# Altium PCB PCB1.PcbDoc (part 2 of 3)
Units mm, origin at the board's own origin, x right, y up, seen from the top; angles counter-clockwise.
Board outline 238 x 185 mm, 2 copper layers (Top Layer, Bottom Layer); 253 components, 247 nets, 920 pads, 36 vias.
Unrouted connection lines stored in the file: 56.
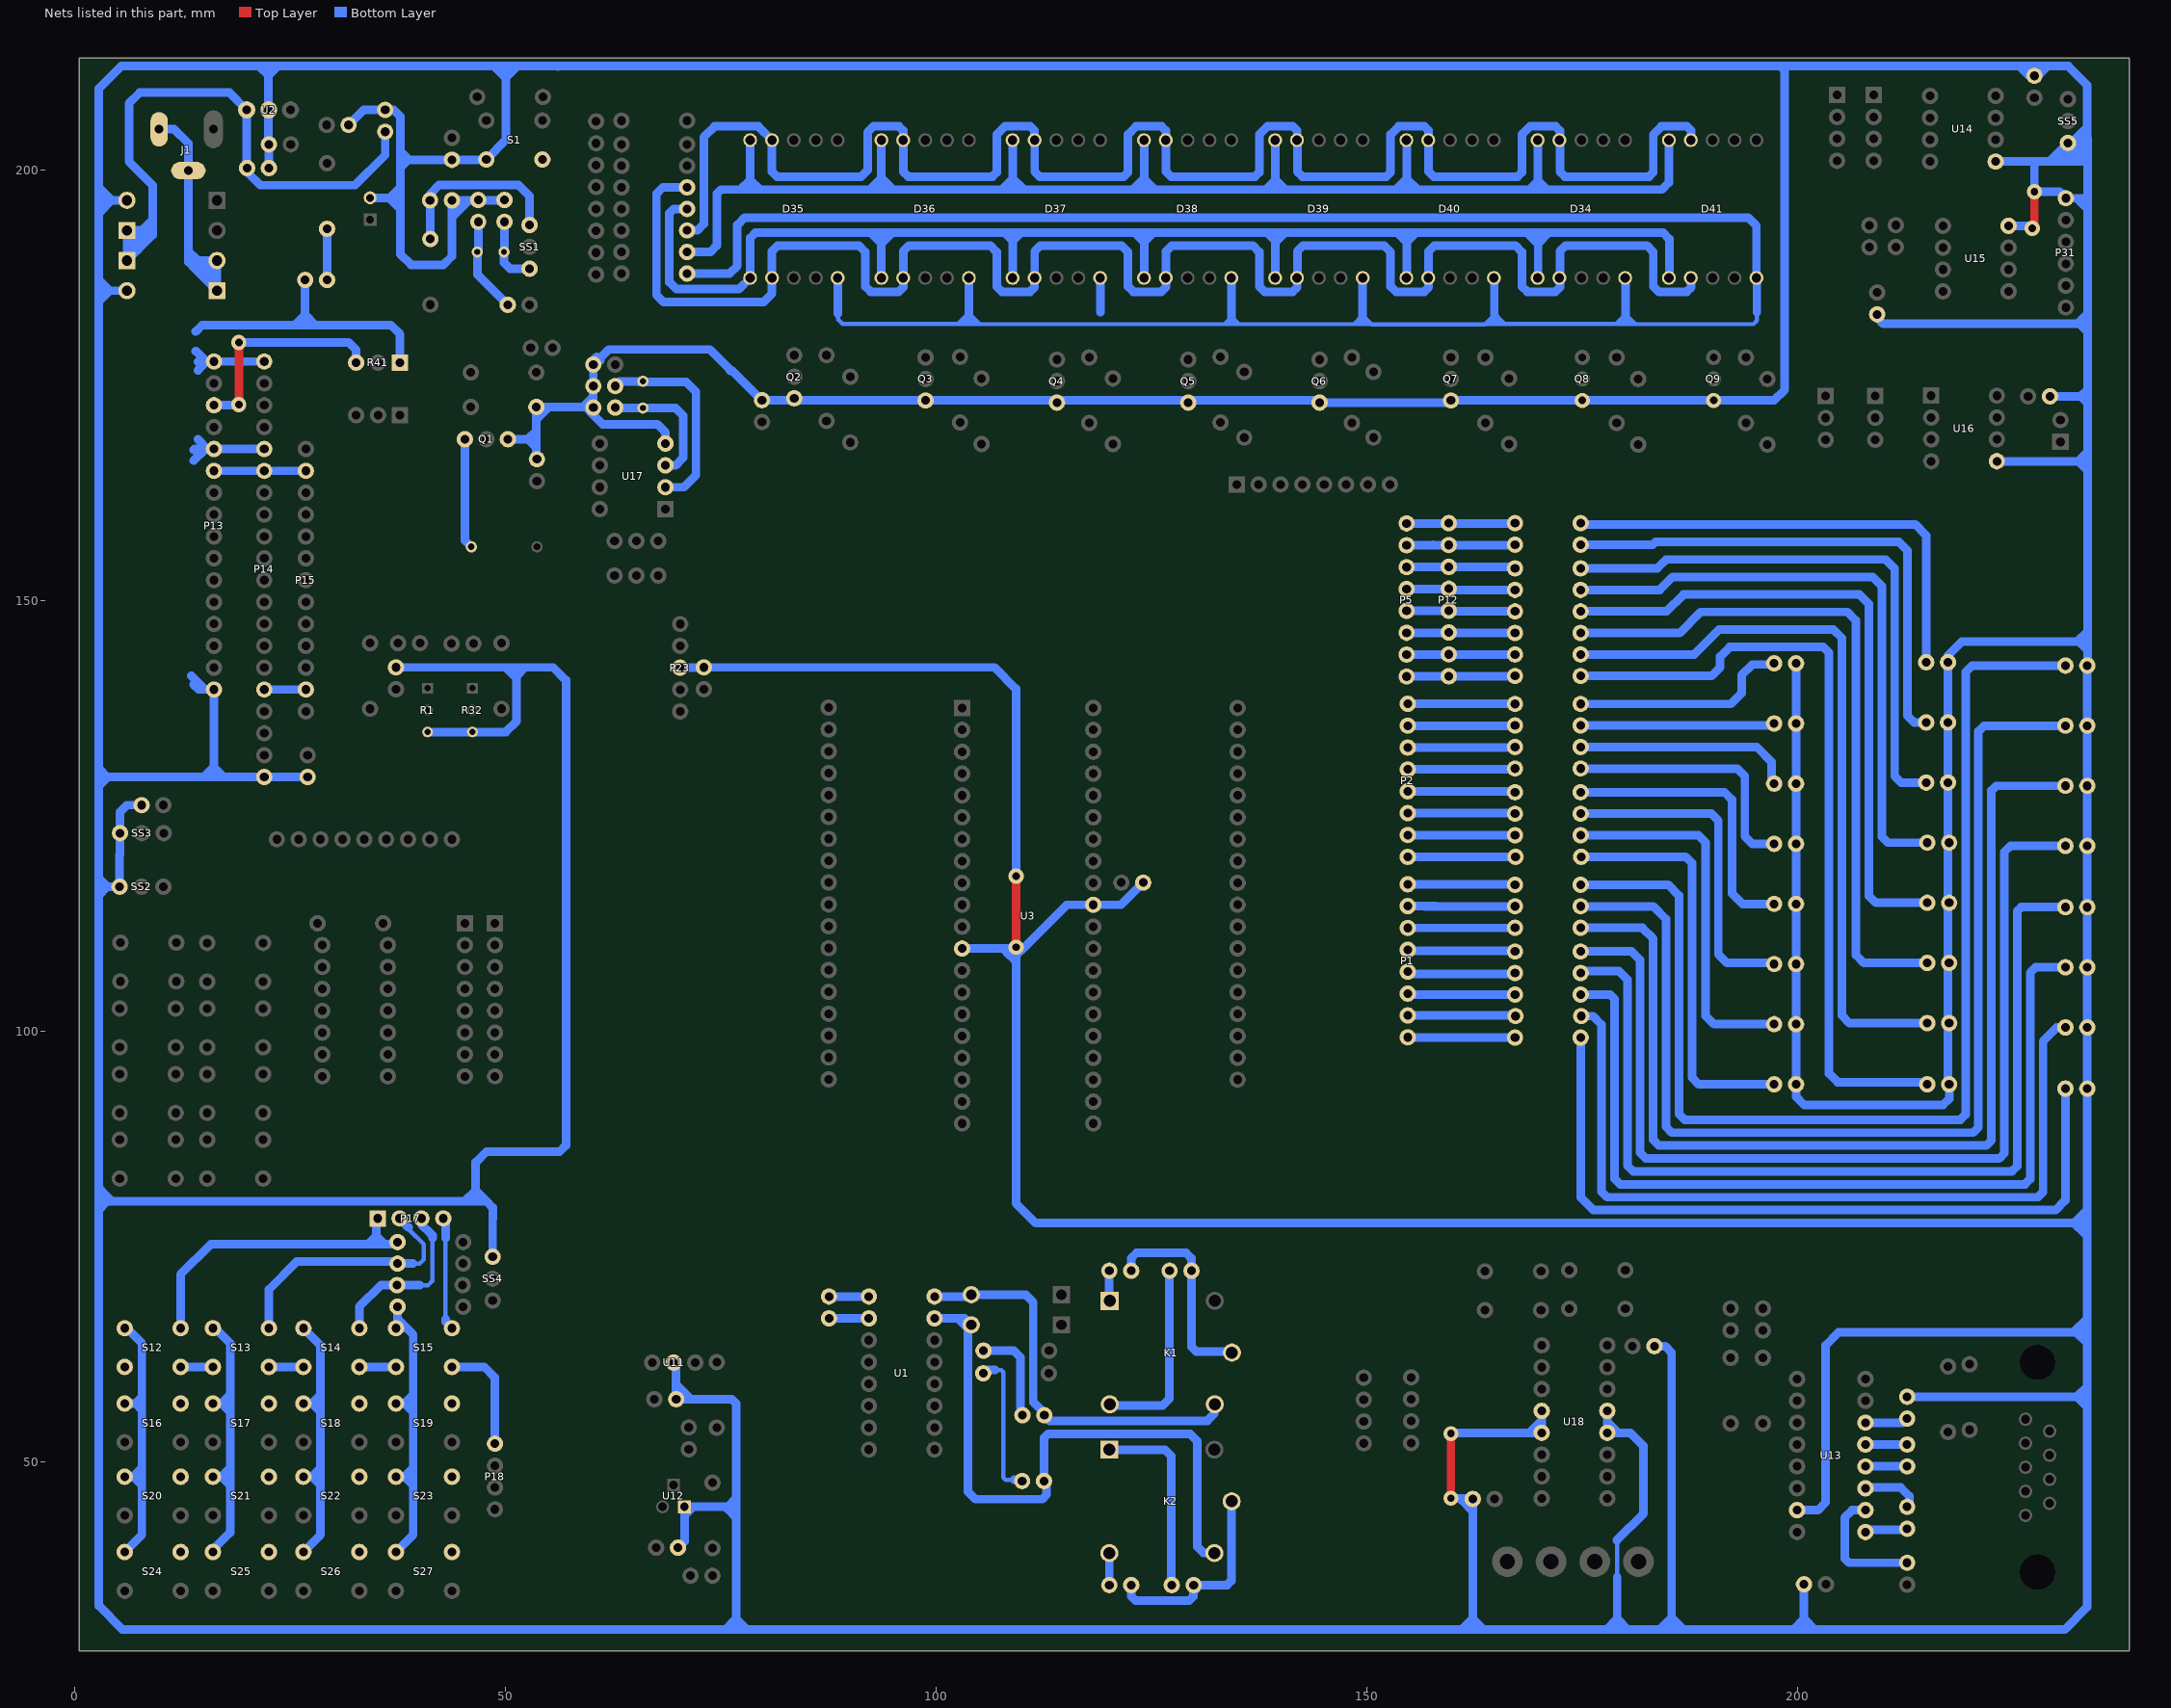
[diagram p2: the nets of this part, all layers, seen from the top]

## Via types
v1: diameter 1.778, hole 0.889, Top Layer to Bottom Layer, 36 vias

## Nets (pads, with @x,y where several pads share a name; then routed paths per layer and width w, separated by ;. In a path a pad name is that pad's centre, name@x,y a point inside that pad or via, vN(x,y) a via of type N, cw(c..) or ccw(c..) an arc to the next point about the centre after c; other vN are vias at no path point) (continued)
c2: P14.16 P15.12 | length 4.8
  Bottom Layer w1: P14.16@21.963,139.676 P15.12@26.789,139.676
D: D34.2 D35.2 D36.2 D37.2 D38.2 D39.2 D40.2 D41.2 R58.2 | length 203
  Bottom Layer w1: R58.2@71.06,198 68.25,198 67.5,197.25 67.5,185.5 68.325,184.675 79.925,184.675 80.919,185.669 D35.2@80.919,187.485 80.919,190.581 81.588,191.25 91,191.25 91.75,190.5 91.75,186.5 92.375,185.875 95.625,185.875 96.159,186.409 D36.2@96.159,187.485 ; D36.2@96.169,187.485 96.169,190.581 96.838,191.25 106.25,191.25 107,190.5 107,186.5 107.625,185.875 110.875,185.875 111.409,186.409 D37.2@111.409,187.485 ; D37.2@111.419,187.485 111.419,190.581 112.088,191.25 121.5,191.25 122.25,190.5 122.25,186.5 122.875,185.875 126.125,185.875 126.659,186.409 D38.2@126.659,187.485 ; D38.2@126.669,187.485 126.669,190.581 127.338,191.25 136.75,191.25 137.5,190.5 137.5,186.5 138.125,185.875 141.375,185.875 141.909,186.409 D39.2@141.909,187.485 ; D39.2@141.919,187.485 141.919,190.581 142.588,191.25 152,191.25 152.75,190.5 152.75,186.5 153.375,185.875 156.625,185.875 157.159,186.409 D40.2@157.159,187.485 ; D40.2@157.169,187.485 157.169,190.581 157.838,191.25 167.25,191.25 168,190.5 168,186.5 168.625,185.875 171.875,185.875 172.409,186.409 D34.2@172.409,187.485 ; D34.2@172.419,187.485 172.419,190.581 173.088,191.25 182.5,191.25 183.25,190.5 183.25,186.5 183.875,185.875 187.125,185.875 187.659,186.409 D41.2@187.659,187.485
DP: D34.5 D35.5 D36.5 D37.5 D38.5 D39.5 D40.5 D41.5 R62.2 | length 302.9
  Bottom Layer w0.5: 88.615,183.25 88.615,182.635 89.115,182.135 98.067,182.135 98.071,182.139 99.429,182.139 99.433,182.135 102.5,182.135 ; 103.779,183.25 103.779,183.164 ; 119.039,183.424 119.039,183.5 ; 134.289,183 134.289,182.924 ; 148.5,182.135 150.5,182.135 ; 163.726,182.111 150.524,182.111 149.539,183.096 149.539,183.174 149.499,183.134 148.476,182.111 135.102,182.111 135.078,182.135 ; 164.789,182.5 165.635,182.5 ; 166,182.135 165.635,182.5 ; 181.25,182.135 181.154,182.135 ; 195.279,183.529 195.279,182.529 194.861,182.111 181.178,182.111 181.154,182.135 ; 102.5,182.135 102.75,182.135 ; 102.5,182.135 103.529,183.164 103.779,183.164 ; 102.75,182.135 104.75,182.135 ; 102.75,182.135 103.779,183.164 ; 103.779,183.164 103.971,183.164 105,182.135 ; 103.779,183.164 103.779,183.106 104.75,182.135 ; 104.75,182.135 105,182.135 ; 105,182.135 105.024,182.111 133.476,182.111 133.5,182.135 ; 133.5,182.135 135.078,182.135 ; 133.5,182.135 134.289,182.924 ; 134.289,182.924 135.078,182.135 ; 165.635,182.5 164.885,183.25 164.789,183.25 164.789,183.174 163.754,182.139 175.804,182.139 175.808,182.135 178.924,182.135 ; 178.924,182.135 179.289,182.5 ; 178.924,182.135 181.154,182.135 ; 179.289,182.5 180.039,183.25 180.645,182.644 ; 179.289,182.5 180.5,182.5 180.645,182.644 ; 180.645,182.644 181.154,182.135
  Bottom Layer w1: R62.2@71.06,188 76,188 76.879,188.879 76.879,193.629 77.75,194.5 194.25,194.5 195.222,193.528 D41.5@195.222,187.485 ; 88.539,183.326 D35.5@88.539,187.485 ; 103.779,182.5 103.779,183.106 ; 103.779,183.25 D36.5@103.779,187.485 D36.5@104,187.264 ; D37.5@119.029,187.485 D37.5@119.25,187.264 ; 119.039,183.5 D37.5@119.039,187.485 ; D38.5@134.279,187.485 D38.5@134.5,187.264 ; 134.289,182.461 134.289,182.924 ; 134.289,183 D38.5@134.289,187.485 ; D39.5@149.499,187.485 149.499,183.134 149.499,182.501 149.5,182.5 ; D39.5@149.529,187.485 D39.5@149.539,187.475 ; D40.5@164.779,187.485 D40.5@165,187.264 ; 164.789,182.5 164.789,183.174 ; 164.789,183.25 D40.5@164.789,187.485 ; 180.039,182.711 180.039,183.25 D34.5@180.039,187.485 ; 195.279,183.529 D41.5@195.279,187.485
E: D34.1 D35.1 D36.1 D37.1 D38.1 D39.1 D40.1 D41.1 R59.2 | length 188.4
  Bottom Layer w1: R59.2@71.06,195.5 69.5,195.5 69,195 69,187 69.825,186.175 77.069,186.175 D35.1@78.379,187.485 78.379,192.121 79.008,192.75 92.349,192.75 ; D36.1@93.619,187.485 93.619,191.48 ; 95,192.75 94.889,192.75 ; D37.1@108.869,187.485 108.869,191.75 ; D38.1@124.119,187.485 124.119,191.631 ; D39.1@139.369,187.485 139.369,191.75 ; D40.1@154.629,187.485 154.629,191.629 ; D34.1@169.879,187.485 169.879,191.5 ; 171.25,192.75 171.129,192.75 ; D41.1@185.119,187.485 185.119,192.012 184.381,192.75 171.129,192.75 ; 92.349,192.75 93.5,192.75 ; 92.349,192.75 93.619,191.48 ; 93.5,192.75 94.889,192.75 ; 93.5,192.75 93.619,192.631 93.619,191.48 ; 93.619,191.48 94.889,192.75 ; 94.889,192.75 107.869,192.75 ; 107.869,192.75 108.75,192.75 ; 107.869,192.75 108.869,191.75 ; 108.75,192.75 109.869,192.75 ; 108.75,192.75 108.869,192.631 108.869,191.75 ; 108.869,191.75 109.869,192.75 ; 109.869,192.75 123,192.75 ; 123,192.75 124,192.75 ; 123,192.75 124.119,191.631 ; 124,192.75 125.25,192.75 ; 124,192.75 124.119,192.631 124.119,191.631 ; 124.119,191.631 124.131,191.631 125.25,192.75 ; 125.25,192.75 138.369,192.75 ; 138.369,192.75 139.25,192.75 ; 138.369,192.75 139.369,191.75 ; 139.25,192.75 140.5,192.75 ; 139.25,192.75 139.369,192.631 139.369,191.75 ; 139.369,191.75 139.5,191.75 140.5,192.75 ; 140.5,192.75 153.508,192.75 ; 153.508,192.75 154.5,192.75 ; 153.508,192.75 154.629,191.629 ; 154.5,192.75 155.75,192.75 ; 154.5,192.75 154.629,192.621 154.629,191.629 ; 154.629,191.629 155.75,192.75 ; 155.75,192.75 168.549,192.75 ; 168.549,192.75 169.879,192.75 ; 168.549,192.75 169.799,191.5 169.879,191.5 ; 169.879,191.5 169.879,192.75 ; 169.879,191.5 171.129,192.75 ; 169.879,192.75 171.129,192.75
en: P13.6 P14.6 P15.2 | length 10.7
  Bottom Layer w1: P13.6@16.121,165.076 P14.6@21.963,165.076 P15.2@26.789,165.076
F: D34.9 D35.9 D36.9 D37.9 D38.9 D39.9 D40.9 D41.9 R60.2 | length 199.6
  Bottom Layer w1: R60.2@71.06,193 72.25,193 73,193.75 73,203.845 74.25,205.095 79.309,205.095 D35.9@80.919,203.485 80.919,199.831 81.5,199.25 91.25,199.25 92.009,200.009 92.009,204.41 92.694,205.095 95.655,205.095 96.159,204.591 D36.9@96.159,203.485 ; D36.9@96.169,203.485 96.169,199.831 96.75,199.25 106.5,199.25 107,199.75 107,204.151 107.944,205.095 110.905,205.095 111.409,204.591 D37.9@111.409,203.485 ; D37.9@111.419,203.485 111.419,199.831 112,199.25 121.75,199.25 122.25,199.75 122.25,204.151 123.194,205.095 126.155,205.095 126.659,204.591 D38.9@126.659,203.485 ; D38.9@126.669,203.485 126.669,199.831 127.25,199.25 137,199.25 137.5,199.75 137.5,204.151 138.444,205.095 141.405,205.095 141.909,204.591 D39.9@141.909,203.485 ; D39.9@141.919,203.485 141.919,199.831 142.5,199.25 152.25,199.25 152.75,199.75 152.75,204.151 153.694,205.095 156.655,205.095 157.159,204.591 D40.9@157.159,203.485 ; D40.9@157.169,203.485 157.169,199.831 157.75,199.25 167.5,199.25 168,199.75 168,204.151 168.944,205.095 171.905,205.095 172.409,204.591 D34.9@172.409,203.485 ; D34.9@172.419,203.485 172.419,199.831 173,199.25 182.75,199.25 183.25,199.75 183.25,204.151 184.194,205.095 187.155,205.095 187.659,204.591 D41.9@187.659,203.485
G: D34.10 D35.10 D36.10 D37.10 D38.10 D39.10 D40.10 D41.10 R61.2 | length 198.9
  Bottom Layer w1: R61.2@71.06,190.5 73.75,190.5 74.5,191.25 74.5,197.25 75,197.75 77.25,197.75 ; 78.379,197.871 78.379,198.879 ; D35.10@78.379,203.485 78.379,198.879 ; 79.75,197.75 79.508,197.75 ; D36.10@93.619,203.485 93.619,199.111 ; D36.10@93.629,203.485 93.629,199.121 93.619,199.111 ; D37.10@108.869,203.485 108.869,199.03 ; D37.10@108.879,203.485 108.879,199.04 108.869,199.03 ; D38.10@124.119,203.485 124.119,199 ; D39.10@139.369,203.485 139.369,198.869 ; D40.10@154.619,203.485 154.619,199 ; D34.10@169.869,203.485 169.869,198.75 ; D41.10@185.062,203.485 185.062,198.562 184.25,197.75 170.869,197.75 ; 77.25,197.75 79.508,197.75 ; 77.25,197.75 78.379,198.879 ; 78.379,198.879 79.508,197.75 ; 79.508,197.75 92.258,197.75 ; 92.258,197.75 93.5,197.75 ; 92.258,197.75 93.619,199.111 ; 93.5,197.75 94.98,197.75 ; 93.5,197.75 93.619,197.869 93.619,199.111 ; 93.619,199.111 94.98,197.75 ; 94.98,197.75 107.589,197.75 ; 107.589,197.75 108.75,197.75 ; 107.589,197.75 108.869,199.03 ; 108.75,197.75 110,197.75 ; 108.75,197.75 108.869,197.869 108.869,199.03 ; 108.869,199.03 110,197.899 110,197.75 ; 110,197.75 122.829,197.75 ; 122.829,197.75 124,197.75 ; 122.829,197.75 124.079,199 ; 124,197.75 125.329,197.75 ; 124,197.75 124.119,197.869 124.119,198.96 ; 124.079,199 124.119,198.96 ; 124.079,199 124.119,199 ; 124.119,198.96 124.119,199 ; 124.119,198.96 125.329,197.75 ; 125.329,197.75 138.25,197.75 ; 138.25,197.75 139.25,197.75 ; 138.25,197.75 139.369,198.869 ; 139.25,197.75 140.488,197.75 ; 139.25,197.75 139.369,197.869 139.369,198.869 ; 139.369,198.869 140.488,197.75 ; 140.488,197.75 153.369,197.75 ; 153.369,197.75 154.5,197.75 ; 153.369,197.75 154.619,199 ; 154.5,197.75 155.869,197.75 ; 154.5,197.75 154.619,197.869 154.619,199 ; 154.619,199 155.869,197.75 ; 155.869,197.75 168.869,197.75 ; 168.869,197.75 169.75,197.75 ; 168.869,197.75 169.869,198.75 ; 169.75,197.75 170.869,197.75 ; 169.75,197.75 169.869,197.869 169.869,198.75 ; 169.869,198.75 170.869,197.75
GND: C1.2 C2.1 C3.1 C4.2 C5.1 C6.2 C7.1 C8.2 C9.2 C10.1 C11.1 C13.1 C14.1 C15.2 C16.1 C19.1 C20.1 C21.1 C22.1 C23.1 C24.1 C25.1 C26.2 C27.1 C28.2 C29.2 C31.1 D1.2 D2.2 D3.2 D4.2 D5.2 D6.2 D7.1 D9.2 D10.2 D11.2 D12.1 D14.2 D15.2 D16.2 D17.2 D18.2 D20.2 D21.2 D22.2 D23.2 D24.2 D25.2 D26.2 D27.2 D28.2 D29.2 D30.2 P13.1 P13.5 P13.16 P14.1 P14.5 P14.20 P16.2 P23.3 P31.6 Q1.3 Q2.3 Q3.3 Q4.3 Q5.3 Q6.3 Q7.3 Q8.3 Q9.3 R1.3 R32.3 R40.1 R41.1 S1.1 S1.2 SS2.3 SS3.3 SS4.3 SS5.3 U2.2 U3.12 U3.31 U11.GND U12.3 U13.15 U14.5 U15.4 U16.5 U17.4 U18.4 U18.5 U18.12 U18.13 | length 2218.5
  Top Layer w1: v1(109.25,109.75) v1(109.25,118) ; v1(159.75,45.75) v1(159.75,53.25) ; v1(227.25,193.25) 227.5,193.5 v1(227.5,197.5)
  Bottom Layer w0.4: 233.617,192.955 233.662,193 ; 233.662,192 233.662,192.043 ; 233.662,193.867 233.662,194
  Bottom Layer w0.5: 2.75,200.25 2.75,200.45 ; 2.75,202.45 2.75,202.5 ; 179.004,40.857 179.056,40.805 179.056,36.597 ; 233.456,186.595 233.662,186.389
  Bottom Layer w1: 2.742,79.25 2.75,79.258 ; 2.75,79.5 2.75,79.258 ; 2.75,141.03 2.75,140.926 ; 2.75,200.25 2.75,197.75 ; 2.75,200.45 2.75,201.25 ; 2.754,177.776 2.75,177.78 ; 2.766,201.234 2.75,201.25 ; SS3.3@5.21,123 5.21,125.46 6,126.25 C23.1@7.71,126.25 ; SS3.3@5.21,123.24 5.21,120.57 5.17,120.53 SS2.3@5.17,116.78 3.72,116.78 ; D12.1@6.02,186 4,186 ; D7.1@6.02,196.5 4.25,196.5 ; 13.5,141.25 15.074,139.676 ; 13.75,140.25 14.324,139.676 15.074,139.676 ; 13.75,166.25 15.116,167.616 ; 13.75,167.5 13.866,167.616 15.116,167.616 ; 14,179 P13.1@15.224,177.776 ; 14,181.25 14.75,182 25.5,182 ; 14.25,168.75 P13.5@15.384,167.616 ; 14.25,176.75 P13.1@15.276,177.776 ; 14.25,177.75 14.276,177.776 P13.1@15.224,177.776 ; P14.5@21.963,167.616 P13.5@16.121,167.616 P13.5@15.384,167.616 ; P14.1@21.963,177.776 P13.1@16.121,177.776 P13.1@15.276,177.776 ; C3.1@22.5,200.25 C2.1@22.5,203 22.46,203.04 U2.2@22.46,207 22.46,211 ; D15.2@26.71,187.25 26.71,183.21 ; C21.1@27,129.516 P14.20@21.963,129.516 17.25,129.516 ; 28,182 27.92,182 ; C4.2@31.75,205.25 33.5,207 C1.2@36,207 37,207 37.753,206.248 37.753,202.208 ; P16.2@34.25,196.79 36.542,196.79 ; C14.1@37.25,142.25 50,142.25 ; R41.1@37.711,177.649 37.711,180.961 36.672,182 27.92,182 ; R1.3@40.925,134.75 R32.3@46.132,134.75 50,134.75 51.25,136 51.25,136.712 51.253,136.714 51.253,138.166 51.25,138.168 51.25,141.25 52.25,142.25 ; C9.2@46.678,196.54 C9.2@46.805,196.54 ; SS4.3@48.53,73.84 SS4.3@48.48,73.79 48.48,78.27 48.5,78.29 48.5,79.5 47.75,80.25 ; C6.2@49.853,196.54 49.813,196.5 45.75,196.5 ; Q1.3@50.25,168.75 52.56,168.75 ; 51,141.25 50,142.25 ; 51.5,212.093 51.343,212.093 ; 53.5,168.75 52.56,168.75 ; R40.1@53.56,172.75 R40.1@53.56,172.5 ; C13.1@53.625,166.425 53.56,166.49 53.56,167.75 ; 56.063,212.031 56,212.093 ; 58.25,172.5 58,172.5 ; C28.2@60.096,175 C28.2@60.173,174.923 ; 60.139,173.605 60.139,173.639 ; U17.4@68.543,168.253 68.543,169.553 67.596,170.5 61.25,170.5 C29.2@60.173,171.577 ; U11.GND@69.501,61.5 69.75,61.251 69.75,59 ; C7.1@69.75,57.25 69.75,59 ; C7.1@69.79,57.25 71.5,57.25 ; C8.2@70,40 70.75,40.75 70.75,43.75 ; P23.3@70.25,142.21 72.96,142.21 C16.1@73,142.25 106.75,142.25 109.25,139.75 v1(109.25,118) ; C22.1@79.73,173.27 76.316,176.684 76.108,176.684 76.042,176.75 76.042,176.829 73.696,179.175 61.987,179.175 60.961,178.149 60.961,177.913 60.562,178.312 60.173,177.923 C27.1@60.173,177.423 C28.2@60.173,174.923 ; C22.1@79.75,173.29 83.29,173.29 Q2.3@83.5,173.5 ; Q2.3@83.5,173.25 Q3.3@98.75,173.25 129,173.25 Q5.3@129.25,173 ; U3.12@102.986,109.59 107.75,109.59 ; 110.5,110.024 110.226,109.75 ; C5.1@124.016,117.25 121.436,114.67 U3.31@118.226,114.67 115.146,114.67 110.226,109.75 ; Q5.3@129.25,173.25 144.25,173.25 Q6.3@144.5,173 159.5,173 Q7.3@159.75,173.25 Q8.3@175,173.25 Q9.3@190.25,173.25 197.25,173.25 198.5,174.5 198.5,211.593 198,212.093 ; v1(159.75,45.75) 160.975,45.75 ; v1(159.75,53.25) 159.849,53.349 168.889,53.349 ; 170.286,54.75 170.286,54.746 ; U18.4@170.286,55.889 170.286,54.746 ; U18.13@177.906,55.889 177.906,54.619 ; 179.004,40.857 182.124,43.977 182.124,51.801 180.576,53.349 179.176,53.349 ; 179.056,36.597 179.056,31.75 ; 179.43,53.349 179.176,53.349 ; C31.1@183.374,63.415 184.624,63.415 185.374,62.665 185.374,31.874 ; D11.2@199.821,142.717 D14.2@199.821,135.732 D16.2@199.821,128.747 D17.2@199.821,121.762 D18.2@199.821,114.777 D20.2@199.821,107.792 D21.2@199.821,100.807 D22.2@199.821,93.822 199.821,92.385 200.781,91.425 216.897,91.425 217.647,92.175 217.647,93.776 D30.2@217.601,93.822 217.474,93.949 D25.2@217.474,128.874 D24.2@217.474,135.859 D23.2@217.474,142.844 217.474,143.636 219.088,145.25 232.5,145.25 ; U13.15@199.942,44.361 U13.15@199.946,44.365 202.365,44.365 203.25,45.25 203.25,63.5 204.75,65 232,65 ; C11.1@200.75,35.75 200.75,31.75 ; C24.1@209.25,183.25 209.25,182.861 209.946,182.165 232.5,182.165 ; C15.2@212.727,57.54 232.429,57.54 ; U14.5@223,201 227.5,201 ; U16.5@223.142,166.188 232.6,166.188 ; U16.5@223.142,166.688 U16.5@223.477,166.353 ; U15.4@224.5,193.54 227.46,193.54 227.25,193.33 v1(227.25,193.25) ; C25.1@229.312,173.728 232.89,173.728 ; SS5.3@231.812,203.165 SS5.3@231.397,203.165 ; 233.639,66.75 233.639,66.639 ; 233.639,74.126 233.639,66.639 ; 233.647,73.258 233.647,76.5 ; 233.662,183.5 233.662,183.327 ; 233.662,192 233.662,186.389 233.662,183.327 ; 233.662,192.043 233.662,193 233.662,193.867 ; 233.662,194 233.662,195.5 ; 2.75,79.258 2.75,79.75 ; 2.75,79.258 3.742,80.25 ; 2.75,79.258 2.75,33.25 5.5,30.5 75.5,30.5 ; 2.75,79.75 3.25,80.25 3.742,80.25 ; 2.75,79.75 2.75,81.5 ; 2.75,81.5 3,81.5 4.25,80.25 ; 2.75,81.5 2.75,113.28 2.75,115.81 ; 2.75,115.81 2.75,116.75 ; 2.75,115.81 3.72,116.78 ; 2.75,116.75 2.75,117.75 ; 2.75,116.75 2.78,116.78 3.72,116.78 ; 2.75,117.75 2.75,128.5 ; 2.75,117.75 3.72,116.78 ; 2.75,128.5 2.75,129.25 ; 2.75,128.5 3.766,129.516 ; 2.75,129.25 2.75,130.5 ; 2.75,129.25 3.016,129.516 3.734,129.516 ; 2.75,130.5 2.75,140.926 ; 2.75,130.5 3.734,129.516 ; 2.75,140.926 2.75,177.78 ; 2.75,177.78 2.75,184.75 ; 2.75,184.75 4,186 ; 2.75,184.75 2.75,186.25 ; 2.75,186.25 3,186 4,186 ; 2.75,186.25 2.75,187.25 ; 2.75,187.25 4,186 ; 2.75,187.25 2.75,195 ; 2.75,195 4.25,196.5 ; 2.75,195 2.75,196.5 ; 2.75,196.5 4.25,196.5 ; 2.75,196.5 2.75,197.75 ; 2.75,197.75 3,197.75 4.25,196.5 ; 2.75,201.25 2.75,202.45 2.75,209.5 5.343,212.093 21.367,212.093 ; 3.734,129.516 3.766,129.516 ; 3.742,80.25 4.25,80.25 ; 3.766,129.516 14.887,129.516 ; 4.25,80.25 5.75,80.25 45.25,80.25 ; 14.887,129.516 16.121,129.516 ; 14.887,129.516 16.121,130.75 ; 15.074,139.676 P13.16@16.121,139.676 16.121,130.75 ; 15.116,167.616 P13.5@15.384,167.616 ; P13.1@15.224,177.776 P13.1@15.276,177.776 ; 16.121,129.516 17.25,129.516 ; 16.121,129.516 16.121,130.645 ; 16.121,130.645 16.121,130.75 ; 16.121,130.645 17.25,129.516 ; 21.367,212.093 22.25,212.093 ; 21.367,212.093 22.46,211 ; 22.25,212.093 23.553,212.093 ; 22.25,212.093 22.46,211.883 22.46,211 ; 22.46,211 23.553,212.093 ; 23.553,212.093 48.657,212.093 ; 25.5,182 26.71,183.21 ; 25.5,182 26.75,182 ; 26.71,183.21 26.71,182.04 26.75,182 ; 26.71,183.21 27.92,182 ; 26.75,182 27.92,182 ; 36.542,196.79 37.753,198 ; 36.542,196.79 37.713,196.79 37.753,196.75 ; 36.542,196.79 36.542,196.71 37.753,195.5 ; 37.753,195.5 37.753,190.25 39,189.002 39,189 42.75,189 43.75,190 43.75,194.5 ; 37.753,195.5 37.753,196.75 ; 37.753,196.75 37.753,198 ; 37.753,198 37.753,200.25 ; 37.753,200.25 37.753,201.25 ; 37.753,200.25 38.713,201.21 ; 37.753,201.25 37.753,202.208 ; 37.753,201.25 37.792,201.21 38.713,201.21 ; 37.753,202.208 38.75,201.21 ; 38.713,201.21 38.75,201.21 ; 38.75,201.21 47.719,201.21 S1.2@47.749,201.239 50,203.491 50,210.75 ; 43.75,194.5 C10.1@43.75,196.5 45.75,196.5 ; 43.75,194.5 45.75,196.5 ; 45.25,80.25 46.25,80.25 ; 45.25,80.25 46.5,81.5 ; 46.25,80.25 46.5,80.5 ; 46.25,80.25 46.5,80.25 ; 46.5,80.25 47.75,80.25 ; 46.5,80.25 46.5,80.5 ; 46.5,80.5 46.5,81.5 ; 46.5,81.5 46.5,84.75 47.75,86 56.25,86 57,86.75 57,140.75 55.5,142.25 55,142.25 52.25,142.25 ; 46.5,81.5 47.75,80.25 ; 48.657,212.093 50,210.75 ; 48.657,212.093 50,212.093 ; 50,142.25 52.25,142.25 ; 50,210.75 50,212.093 ; 50,210.75 51.343,212.093 ; 50,212.093 51.343,212.093 ; 51.343,212.093 56,212.093 ; 52.56,168.75 53.56,167.75 ; 52.56,168.75 53.56,169.75 ; 53.56,167.75 53.56,169.75 ; 53.56,169.75 53.56,171 53.56,171.06 ; 53.56,171.06 55,172.5 ; 53.56,171.06 R40.1@53.56,172.5 ; R40.1@53.56,172.5 55,172.5 ; 55,172.5 58,172.5 ; 56,212.093 198,212.093 ; 58,172.5 59,172.5 ; 59,172.5 60.139,173.639 ; 59,172.5 C29.2@59.25,172.5 ; C29.2@59.25,172.5 C29.2@60.173,171.577 ; C29.2@59.25,172.5 60.096,172.5 C29.2@60.173,172.423 ; 60.139,173.639 60.139,174.034 C28.2@60.173,174.034 ; 60.139,173.639 60.173,173.673 ; C29.2@60.173,171.577 C29.2@60.173,172.423 ; C29.2@60.173,172.423 60.173,173.673 ; 60.173,173.673 C28.2@60.173,174.034 ; C28.2@60.173,174.034 C28.2@60.173,174.923 ; 69.75,59 71.5,57.25 ; 70.75,43.75 U12.3@70.75,44.75 71.75,44.75 ; 70.75,43.75 71.75,44.75 ; 71.5,57.25 76.25,57.25 76.75,56.75 76.75,45.75 ; 71.75,44.75 75.75,44.75 ; 75.5,30.5 76.75,31.75 ; 75.5,30.5 77,30.5 ; 75.75,44.75 76.75,45.75 ; 75.75,44.75 76.5,44.75 76.75,44.5 ; 75.75,44.75 75.75,44.5 76.75,43.5 ; 76.75,31.75 78,30.5 ; 76.75,31.75 76.75,30.75 77,30.5 ; 76.75,31.75 76.75,43.5 ; 76.75,43.5 76.75,44.5 ; 76.75,44.5 76.75,45.75 ; 77,30.5 78,30.5 ; 78,30.5 161,30.5 ; 107.75,109.59 109.09,109.59 v1(109.25,109.75) ; 107.75,109.59 108.42,108.92 108.908,108.432 ; 108.908,108.432 109.25,108.09 ; 108.908,108.432 109.25,108.774 ; 109.25,108.09 109.25,108 109.25,81.298 109.25,80 111.537,77.713 232.11,77.713 ; 109.25,108.09 109.25,108.774 ; 109.25,108.774 v1(109.25,109.75) ; 109.25,108.774 110.226,109.75 ; v1(109.25,109.75) 110.226,109.75 ; 160.975,45.75 160.975,45.56 162.286,44.25 ; 160.975,45.75 162.201,45.75 C26.2@162.286,45.665 162.286,44.25 ; 161,30.5 162.286,31.786 ; 161,30.5 162.286,30.5 ; 162.286,30.5 163.572,30.5 ; 162.286,30.5 162.286,31.786 ; 162.286,31.786 163.572,30.5 ; 162.286,31.786 162.286,44.25 ; 163.572,30.5 177.806,30.5 ; 168.889,53.349 U18.5@170.286,53.349 170.286,54.746 ; 168.889,53.349 170.286,54.746 ; 177.806,30.5 179.056,30.5 ; 177.806,30.5 179.056,31.75 ; 177.906,54.619 179.176,53.349 ; 177.906,54.619 U18.12@177.906,53.349 179.176,53.349 ; 179.056,30.5 180.306,30.5 ; 179.056,30.5 179.056,31.75 ; 179.056,31.75 180.306,30.5 ; 180.306,30.5 184,30.5 ; 184,30.5 185.374,30.5 ; 184,30.5 185.374,31.874 ; 185.374,30.5 186.748,30.5 ; 185.374,30.5 185.374,31.874 ; 185.374,31.874 186.748,30.5 ; 186.748,30.5 199.5,30.5 ; 198,212.093 225.75,212.093 ; 199.5,30.5 200.75,31.75 ; 199.5,30.5 200.75,30.5 ; 200.75,30.5 202,30.5 ; 200.75,30.5 200.75,31.75 ; 200.75,31.75 202,30.5 ; 202,30.5 231,30.5 233.639,33.139 233.639,56.33 ; 225.75,212.093 226.888,210.955 C20.1@227.5,210.955 ; 225.75,212.093 227.501,212.093 ; 227.5,201 229.232,201 ; 227.5,201 v1(227.5,197.5) 230.392,197.5 230.892,197 P31.6@231.147,196.745 232.417,196.745 ; C20.1@227.5,210.955 228.621,212.076 ; C20.1@227.5,210.955 227.5,212.092 227.501,212.093 ; C20.1@227.5,210.955 227.879,210.955 229,212.076 ; 227.501,212.093 227.518,212.076 228.621,212.076 ; 228.621,212.076 229,212.076 ; 229,212.076 231.424,212.076 233.647,209.853 233.647,205 ; 229.232,201 SS5.3@231.397,203.165 ; 229.232,201 229.5,201 ; 229.5,201 SS5.3@231.397,202.897 ; 229.5,201 230.75,201 ; 230.75,201 231.397,201.647 ; 230.75,201 231.5,201 ; 231.397,201.647 231.397,201.103 231.5,201 ; 231.397,201.647 231.397,201.853 ; 231.397,201.853 232.25,201 ; 231.397,201.853 SS5.3@231.397,202.897 ; SS5.3@231.397,202.897 SS5.3@231.397,203.015 ; SS5.3@231.397,203.015 SS5.3@231.397,203.165 ; SS5.3@231.397,203.015 232.384,202.029 ; SS5.3@231.397,203.165 231.812,202.75 233.105,202.75 ; 231.5,201 232.25,201 ; 232,65 232.389,65 ; 232,65 233.639,66.639 ; 232.11,77.713 233.647,79.25 ; 232.11,77.713 233.434,77.713 233.647,77.5 ; 232.11,77.713 233.323,76.5 233.647,76.5 ; 232.25,201 233.412,201 ; 232.384,202.029 233.105,202.75 ; 232.384,202.029 233.412,201 ; 232.389,65 233.639,65 ; 232.389,65 233.639,63.75 ; 232.417,196.745 233.662,195.5 ; 232.417,196.745 233.492,196.745 233.662,196.915 ; 232.429,57.54 233.639,56.33 ; 232.429,57.54 233.599,57.54 233.639,57.5 ; 232.429,57.54 233.639,58.75 ; 232.5,145.25 232.662,145.25 ; 232.5,145.25 233.662,146.412 ; 232.5,182.165 232.747,182.165 ; 232.5,182.165 233.662,183.327 ; 232.6,166.188 233.662,165.126 ; 232.6,166.188 233.662,167.25 ; 232.662,145.25 233.662,145.25 ; 232.662,145.25 233.662,144.25 ; 232.747,182.165 233.662,182.165 ; 232.747,182.165 233.662,181.25 ; 232.89,173.728 233.662,172.956 ; 232.89,173.728 233.625,173.728 233.662,173.765 ; 232.89,173.728 233.662,174.5 ; 233.105,202.75 233.662,202.75 ; 233.105,202.75 233.105,201.807 233.662,201.25 ; 233.412,201 233.662,201.25 ; 233.639,56.33 233.639,57.5 ; 233.639,57.5 233.639,58.75 ; 233.639,58.75 233.639,63.75 ; 233.639,63.75 233.639,65 ; 233.639,65 233.639,66.639 ; 233.647,76.5 233.647,77.5 ; 233.647,77.5 233.647,79.25 ; 233.647,79.25 D10.2@233.647,93.314 D9.2@233.647,100.426 D6.2@233.647,107.411 D5.2@233.647,114.396 D4.2@233.647,121.508 D3.2@233.647,128.493 D2.2@233.647,135.478 D1.2@233.647,142.463 233.662,142.478 233.662,144.25 ; 233.647,203.624 233.662,203.639 233.662,202.75 ; 233.647,203.624 233.647,205 ; 233.647,203.624 232.271,203.624 233.647,205 ; 233.662,144.25 233.662,145.25 ; 233.662,145.25 233.662,146.412 ; 233.662,146.412 233.662,165.126 ; 233.662,165.126 233.662,167.25 ; 233.662,167.25 233.662,172.956 ; 233.662,172.956 233.662,173.765 ; 233.662,173.765 233.662,174.5 ; 233.662,174.5 233.662,181.25 ; 233.662,181.25 233.662,182.165 ; 233.662,182.165 233.662,183.327 ; 233.662,195.5 233.662,196.915 ; 233.662,196.915 233.662,201.25 ; 233.662,201.25 233.662,202.75
i1: P42.1 U1.1 | length 4.6
  Bottom Layer w1: P42.1@87.536,69.179 U1.1@92.166,69.179
i2: P42.2 U1.2 | length 4.6
  Bottom Layer w1: P42.2@87.536,66.639 U1.2@92.166,66.639
NetBUZ1_N: BUZ1.N Q1.1 | length 12.8
  Bottom Layer w1: Q1.1@45.25,168.75 45.25,157.005 BUZ1.N@46.005,156.25
NetC1_1: C1.1 C3.2 D8.2 D13.2 U2.1 | length 78.1
  Bottom Layer w1: C1.1@36,204.46 36,201.75 32.5,198.25 21.5,198.25 19.96,199.79 C3.2@19.96,200.25 19.92,200.29 U2.1@19.92,207 17.92,209 7.5,209 6.25,207.75 6.25,201 9,198.25 9,194.25 ; 6.02,190.75 7.25,190.75 7.26,190.74 ; 6.02,190.75 D13.2@6.02,189.5 7.26,190.74 ; 6.02,190.75 6.02,191.27 ; 6.02,191.27 6.25,191.5 ; 6.02,191.27 6.02,191.5 ; 6.02,191.5 D8.2@6.02,193 7.75,193 ; 6.02,191.5 6.25,191.5 ; 6.25,191.5 7.25,191.5 9,193.25 ; 6.25,191.5 7.75,193 ; 7.26,190.74 9,192.48 9,193.25 ; 7.75,193 9,194.25 ; 9,193.25 9,194.25
NetC6_1: C6.1 SS1.1 Y1.1 | length 8.1
  Bottom Layer w1: C6.1@49.879,193.974 C6.1@49.853,194 49.853,190.553 Y1.1@49.8,190.5 49.8,189.25 50.495,188.555 SS1.1@52.77,188.555
NetC9_1: C9.1 P21.2 Y1.2 | length 11.2
  Bottom Layer w1: C9.1@46.779,193.974 C9.1@46.805,194 46.805,190.605 Y1.2@46.7,190.5 46.7,187.894 P21.2@50.23,184.364
NetC10_2: C10.2 R27.1 SS1.3 | length 21.1
  Bottom Layer w1: R27.1@41.25,192 41.21,192.04 C10.2@41.21,196.5 41.21,197.21 42.293,198.293 51.457,198.293 52.75,197 52.75,193.655 SS1.3@52.77,193.635
NetC12_1: C12.1 U13.2 | length 15.2
  Bottom Layer w1: U13.2@207.886,44.365 206.342,44.365 205.477,43.5 205.477,38.75 205.977,38.25 C12.1@212.977,38.25
NetC15_1: C15.1 U13.6 | length 5.1
  Bottom Layer w1: U13.6@207.886,54.525 207.911,54.5 212.227,54.5 C15.1@212.727,55
NetC17_1: C17.1 U13.1 | length 5.2
  Bottom Layer w1: U13.1@207.886,41.825 208.146,42.085 C17.1@212.977,42.085
NetC17_2: C17.2 U13.3 | length 6.8
  Bottom Layer w1: U13.3@207.886,46.905 207.981,47 211.977,47 212.977,46 C17.2@212.977,44.75
NetC18_1: C18.1 U13.4 | length 5.3
  Bottom Layer w1: U13.4@207.886,49.445 C18.1@213.227,49.445
NetC18_2: C18.2 U13.5 | length 5.3
  Bottom Layer w1: U13.5@207.386,51.985 C18.2@212.727,51.985
NetC28_1: C28.1 U17.2 Y2.1 | length 23.9
  Bottom Layer w1: C28.1@62.713,174.923 63.263,175.473 65.423,175.473 65.473,175.423 70.923,175.423 72.085,174.261 72.085,164.585 70.673,163.173 U17.2@68.543,163.173
NetC29_1: C29.1 U17.3 Y2.2 | length 15.4
  Bottom Layer w1: C29.1@62.923,172.423 62.973,172.373 69.723,172.373 70.585,171.511 70.585,166.585 69.713,165.713 U17.3@68.543,165.713
NetD1_1: D1.1 R2.2 | length 134.2
  Bottom Layer w1: R2.2@175.06,117 184.982,117 186.232,115.75 186.232,90.378 186.897,89.713 218.897,89.713 219.506,90.322 219.506,141.701 220.268,142.463 D1.1@231.107,142.463
NetD2_1: D2.1 R3.2 | length 127.6
  Bottom Layer w1: R3.2@175.06,114.5 183.232,114.5 184.732,113 184.732,88.878 185.397,88.213 220.397,88.213 221.006,88.822 221.006,134.819 221.665,135.478 D2.1@231.107,135.478
NetD3_1: D3.1 R4.2 | length 121.6
  Bottom Layer w1: R4.2@174.81,112 181.982,112 183.232,110.75 183.232,87.378 183.897,86.713 221.897,86.713 222.506,87.322 222.506,127.937 223.062,128.493 D3.1@231.107,128.493
NetD4_1: D4.1 R6.2 | length 114.9
  Bottom Layer w1: R6.2@174.81,109.25 180.732,109.25 181.732,108.25 181.732,85.878 182.397,85.213 223.397,85.213 224.006,85.822 224.006,120.801 224.713,121.508 D4.1@231.107,121.508
NetD5_1: D5.1 R7.2 | length 108.7
  Bottom Layer w1: R7.2@174.81,107 179.232,107 180.232,106 180.232,84.378 180.897,83.713 224.897,83.713 225.506,84.322 225.506,113.919 225.983,114.396 D5.1@231.107,114.396
NetD6_1: D6.1 R8.2 | length 102.4
  Bottom Layer w1: R8.2@174.56,104.25 178.232,104.25 178.732,103.75 178.732,82.878 179.397,82.213 226.397,82.213 227.006,82.822 227.006,106.783 227.634,107.411 D6.1@231.107,107.411
NetD9_1: D9.1 R9.2 | length 94.7
  Bottom Layer w1: R9.2@174.87,101.75 176.25,101.75 177.232,100.768 177.232,81.378 177.897,80.713 227.897,80.713 228.506,81.322 228.506,98.841 230.091,100.426 D9.1@231.107,100.426
NetD10_1: D10.1 R10.2 | length 89.5
  Bottom Layer w1: R10.2@174.81,99.25 174.81,80.69 176.287,79.213 177.5,79.213 ; 177.276,79.213 229.963,79.213 231.107,80.357 D10.1@231.107,93.314 D10.1@230.685,93.314
NetD11_1: D11.1 R11.2 | length 25.6
  Bottom Layer w1: R11.2@174.81,138 192.25,138 193.5,139.25 193.5,141.34 194.75,142.59 197.154,142.59 D11.1@197.281,142.717
NetD12_2: D12.2 D13.1 J1.2 J1.3 | length 34
  Bottom Layer w1: J1.2@9.75,204.75 11.5,204.75 13.15,203.1 J1.3@13.15,199.95 13.15,190.6 ; 13.15,190.6 14.25,189.5 D13.1@16.48,189.5 D13.1@16.48,188.5 ; 13.15,190.6 13.15,189.33 13.98,188.5 ; 13.98,188.5 D13.1@16.48,188.5 ; 13.98,188.5 14.865,187.615 ; 14.865,187.615 15,187.75 16.48,187.75 ; 14.865,187.615 D12.2@16.48,186 16.48,187.75 ; 16.48,187.75 D13.1@16.48,188.5
NetD14_1: D14.1 R12.2 | length 22.6
  Bottom Layer w1: R12.2@174.81,135.5 197.049,135.5 D14.1@197.281,135.732
NetD15_1: D15.1 R5.1 | length 5.9
  Bottom Layer w1: D15.1@29.25,187.25 R5.1@29.25,193.19
NetD16_1: D16.1 R13.2 | length 25.5
  Bottom Layer w1: R13.2@174.81,133 195.25,133 197,131.25 197,129.028 D16.1@197.281,128.747
NetD17_1: D17.1 R14.2 | length 30.2
  Bottom Layer w1: R14.2@174.81,130.5 193,130.5 193.876,129.624 193.876,122.627 194.741,121.762 D17.1@197.281,121.762
NetD18_1: D18.1 R15.2 | length 34.2
  Bottom Layer w1: R15.2@174.81,127.75 191.5,127.75 192.376,126.874 192.376,115.999 193.598,114.777 D18.1@197.281,114.777
NetD19_1: D19.1 R69.2 | length 11.5
  Bottom Layer w1: R69.2@105.476,62.889 108.988,62.889 109.75,62.127 109.75,55.635 D19.1@109.996,55.389 D19.1@110.036,55.429
NetD19_2: D19.2 D31.1 K1.5 U1.16 | length 47
  Bottom Layer w1: U1.16@99.786,69.179 103.846,69.179 D31.1@104.056,69.389 110.361,69.389 111.25,68.5 111.25,56.925 112.536,55.639 D19.2@112.536,55.389 113.186,54.739 131.448,54.739 132.286,55.577 K1.5@132.286,56.665
NetD20_1: D20.1 R16.2 | length 38.8
  Bottom Layer w1: R16.2@174.81,125.25 190,125.25 190.804,124.446 190.804,108.935 191.82,107.919 197.154,107.919 D20.1@197.281,107.792
NetD21_1: D21.1 R17.2 | length 43.4
  Bottom Layer w1: R17.2@174.81,122.75 188.5,122.75 189.304,121.946 189.304,101.799 190.296,100.807 D21.1@197.281,100.807
NetD22_1: D22.1 R18.2 | length 47.9
  Bottom Layer w1: R18.2@174.87,120.25 187,120.25 187.756,119.494 187.756,94.584 188.518,93.822 D22.1@197.281,93.822
NetD23_1: D23.1 R19.2 | length 55.4
  Bottom Layer w1: R19.2@174.81,158.846 213.664,158.846 214.934,157.576 D23.1@214.934,142.844
NetD24_1: D24.1 R20.2 | length 60.2
  Bottom Layer w1: R20.2@174.81,156.5 183.186,156.5 183.5,156.814 211.759,156.814 212.775,155.798 212.775,136.621 213.537,135.859 D24.1@214.934,135.859
NetD25_1: D25.1 R21.2 | length 65.4
  Bottom Layer w1: R21.2@174.81,153.75 183.718,153.75 184.75,154.782 210.235,154.782 211.275,153.742 211.275,129.612 212.013,128.874 D25.1@214.934,128.874
NetD26_1: D26.1 R22.2 | length 70.7
  Bottom Layer w1: R22.2@174.81,151.25 184,151.25 185.5,152.75 208.711,152.75 209.775,151.686 209.775,122.603 210.489,121.889 D26.1@215.061,121.889
NetD27_1: D27.1 R23.2 | length 75.8
  Bottom Layer w1: R23.2@174.81,148.75 184.782,148.75 186.75,150.718 207.187,150.718 208.275,149.63 208.275,115.721 209.092,114.904 D27.1@215.061,114.904
NetD28_1: D28.1 R24.2 | length 80.7
  Bottom Layer w1: R24.2@175.06,146.25 186.314,146.25 188.75,148.686 205.79,148.686 206.775,147.701 206.775,108.839 207.695,107.919 D28.1@215.061,107.919
NetD29_1: D29.1 R25.2 | length 86.1
  Bottom Layer w1: R25.2@174.81,143.75 188,143.75 190.904,146.654 204.139,146.654 205.155,145.638 205.155,101.823 206.044,100.934 D29.1@215.061,100.934
NetD30_1: D30.1 R26.2 | length 92.1
  Bottom Layer w1: R26.2@174.81,141.25 190,141.25 191,142.25 191,143.5 192.122,144.622 202.996,144.622 203.631,143.987 203.631,143.098 203.655,143.074 203.655,95.068 204.664,94.059 214.824,94.059 D30.1@215.061,93.822
NetD32_1: D32.1 R70.2 | length 17.2
  Bottom Layer w0.5: 106.786,60.639 107.536,60.639 107.786,60.389 107.786,48.139 108.036,47.889 D32.1@109.036,47.889
  Bottom Layer w1: R70.2@105.476,60.639 106.786,60.639 ; D32.1@109.036,47.889 D32.1@110.246,47.889
NetD32_2: D32.2 D33.1 K2.5 U1.15 | length 75.1
  Bottom Layer w1: U1.15@99.786,66.639 102.5,66.639 ; K2.5@132.286,39.389 131.036,39.389 130.286,40.139 130.286,52.389 129.436,53.239 112.989,53.239 112.5,52.75 112.5,48.175 112.786,47.889 112.786,46.139 112.286,45.639 104.536,45.639 103.687,46.487 D33.1@103.687,65.451 ; 102.5,66.639 103.306,66.639 D33.1@104.056,65.889 103.687,65.52 D33.1@103.687,65.451 ; 102.5,66.639 D33.1@103.687,65.451
NetK1_1: K1.1 P29.1 | length 2.5
  Bottom Layer w1: P29.1@120.036,72.165 120.036,69.689 K1.1@120.086,69.639
NetK1_2: K1.2 P3.1 | length 22.1
  Bottom Layer w1: K1.2@120.124,56.5 126.25,56.5 127.036,57.286 P3.1@127.036,72.165
NetK1_4: K1.4 P3.2 P29.2 | length 24.2
  Bottom Layer w1: P29.2@122.624,72.165 122.624,73.624 123.25,74.25 129,74.25 129.624,73.626 P3.2@129.624,72.165 129.624,63.353 130.205,62.772 134.217,62.772 K1.4@134.324,62.665
NetK2_1: K2.1 P46.1 | length 22.4
  Bottom Layer w1: K2.1@120.086,51.389 126.536,51.389 127.286,50.639 P46.1@127.286,35.753
NetK2_2: K2.2 P40.1 | length 3.7
  Bottom Layer w1: P40.1@120.086,35.665 K2.2@120.086,39.389
NetK2_4: K2.4 P40.2 P46.2 | length 25.2
  Bottom Layer w1: P40.2@122.626,35.665 122.626,34.374 123.129,33.871 129.371,33.871 129.874,34.374 P46.2@129.874,34.915 ; P46.2@129.826,35.665 P46.2@129.874,35.665 ; K2.4@134.286,45.389 134.286,36.165 134.26,36.165 133.76,35.665 P46.2@130.624,35.665 ; P46.2@129.874,34.915 P46.2@130.624,35.665 ; P46.2@129.874,34.915 P46.2@129.874,35.665 ; P46.2@129.874,35.665 P46.2@130.624,35.665
NetP1_1: P1.1 R10.1 | length 12.2
  Bottom Layer w1: P1.1@154.736,99.283 R10.1@166.928,99.283
NetP1_2: P1.2 R9.1 | length 12.5
  Bottom Layer w1: P1.2@154.736,101.823 167.177,101.823 R9.1@167.25,101.75
NetP1_3: P1.3 R8.1 | length 12.3
  Bottom Layer w1: P1.3@154.736,104.363 154.849,104.25 R8.1@166.94,104.25
NetP1_4: P1.4 R7.1 | length 12.4
  Bottom Layer w1: P1.4@154.736,106.653 R7.1@167.093,106.653
NetP1_5: P1.5 R6.1 | length 12.5
  Bottom Layer w1: P1.5@154.736,109.443 154.863,109.316 167.124,109.316 R6.1@167.19,109.25
NetP1_6: P1.6 R4.1 | length 12.5
  Bottom Layer w1: P1.6@154.736,111.983 167.173,111.983 R4.1@167.19,112
NetP1_7: P1.7 R3.1 | length 13.9
  Bottom Layer w1: P1.7@154.736,114.523 156.75,114.523 ; 157.911,114.523 156.75,114.523 ; R3.1@167.44,114.5 156.773,114.5 156.75,114.523
NetP1_8: P1.8 R2.1 | length 12.7
  Bottom Layer w1: P1.8@154.736,117.063 167.377,117.063 R2.1@167.44,117
NetP2_1: P2.1 R18.1 | length 13.2
  Bottom Layer w1: P2.1@154.736,120.238 156,120.238 ; 156.641,120.238 156,120.238 ; R18.1@167.25,120.25 156.012,120.25 156,120.238
NetP2_2: P2.2 R17.1 | length 12.5
  Bottom Layer w1: P2.2@154.736,122.778 167.162,122.778 R17.1@167.19,122.75
NetP2_3: P2.3 R16.1 | length 12.5
  Bottom Layer w1: P2.3@154.736,125.318 167.122,125.318 R16.1@167.19,125.25
NetP2_4: P2.4 R15.1 | length 12.5
  Bottom Layer w1: P2.4@154.736,127.858 167.082,127.858 R15.1@167.19,127.75
NetP2_5: P2.5 R14.1 | length 12.5
  Bottom Layer w1: P2.5@154.736,130.398 167.088,130.398 R14.1@167.19,130.5
NetP2_6: P2.6 R13.1 | length 12.5
  Bottom Layer w1: P2.6@154.736,132.938 158.419,132.938 167.128,132.938 R13.1@167.19,133
NetP2_7: P2.7 R12.1 | length 12.5
  Bottom Layer w1: P2.7@154.736,135.478 167.168,135.478 R12.1@167.19,135.5
NetP2_8: P2.8 R11.1 | length 12.5
  Bottom Layer w1: P2.8@154.736,138.018 167.172,138.018 R11.1@167.19,138
NetP5_1: P5.1 P12.1 R26.1 | length 12.6
  Bottom Layer w1: P5.1@154.609,141.193 157.657,141.193 167.133,141.193 R26.1@167.19,141.25
NetP5_2: P5.2 P12.2 R25.1 | length 12.6
  Bottom Layer w1: P5.2@154.609,143.733 157.657,143.733 159.435,143.733 159.452,143.75 R25.1@167.19,143.75
NetP5_3: P5.3 P12.3 R24.1 | length 12.8
  Bottom Layer w1: P5.3@154.609,146.273 157.657,146.273 167.417,146.273 R24.1@167.44,146.25
NetP5_4: P5.4 P12.4 R23.1 | length 12.6
  Bottom Layer w1: P5.4@154.609,148.813 157.657,148.813 159.054,148.813 159.117,148.75 R23.1@167.19,148.75
NetP5_5: P5.5 P12.5 R22.1 | length 12.6
  Bottom Layer w1: P5.5@154.609,151.353 157.657,151.353 159.054,151.353 159.157,151.25 R22.1@167.19,151.25
NetP5_6: P5.6 P12.6 R21.1 | length 12.6
  Bottom Layer w1: P5.6@154.609,153.893 157.657,153.893 167.047,153.893 R21.1@167.19,153.75
NetP5_7: P5.7 P12.7 R20.1 | length 12.4
  Bottom Layer w1: P5.7@154.609,156.433 157.657,156.433 ; 157.657,156.482 157.657,156.433 ; R20.1@167.007,156.433 157.657,156.433
NetP5_8: P5.8 P12.8 R19.1 | length 12.6
  Bottom Layer w1: P5.8@154.609,158.973 157.657,158.973 R19.1@167.19,158.973
NetP13_3: P13.3 R41.3 | length 25.2
  Top Layer w1: v1(19,172.75) v1(19,180)
  Bottom Layer w1: P13.3@16.121,172.696 18.946,172.696 v1(19,172.75) ; v1(19,180) 31.75,180 32.631,179.119 ; R41.3@32.631,177.649 32.631,178.75
NetP17_1: P17.1 R33.1 S12.1 S12.2 S16.1 S16.2 S20.1 S20.2 S24.1 S24.2 | length 74.9
  Bottom Layer w1: S24.1@5.75,39.5 7.75,41.5 7.75,47.25 ; S20.1@5.75,48.25 6.75,48.25 ; S16.1@5.75,56.75 7,56.75 ; S12.1@5.75,65.5 6,65.5 7.75,63.75 7.75,57.5 ; S12.2@12.25,65.5 12.25,71.75 15.75,75.25 35.96,75.25 ; 34,75.25 34.96,76.21 ; 34.96,75.29 34.96,76.21 ; P17.1@34.96,78 34.96,76.25 ; R33.1@37.19,75.25 36,75.25 35.96,75.29 35.96,75.25 ; 6.75,48.25 7.75,49.25 ; 6.75,48.25 7.75,47.25 ; 6.75,48.25 7.75,48.25 ; 7,56.75 7.75,57.5 ; 7,56.75 7.75,56.75 ; 7,56.75 7.75,56 ; 7.75,47.25 7.75,48.25 ; 7.75,48.25 7.75,49.25 ; 7.75,49.25 7.75,56 ; 7.75,56 7.75,56.75 ; 7.75,56.75 7.75,57.5 ; 34.96,76.21 34.96,76.25 ; 34.96,76.25 35.96,75.25
NetP17_2: P17.2 R66.1 S13.1 S13.2 S17.1 S17.2 S21.1 S21.2 S25.1 S25.2 | length 67.3
  Bottom Layer w0.5: 38.75,76.98 38.752,76.98 40.5,75.232 40.5,73.5 40,73 39.25,73
  Bottom Layer w1: S25.1@16,39.5 16,39.75 18,41.75 18,47.25 ; S21.1@16,48.25 17,48.25 ; S17.1@16,56.75 17,56.75 ; S13.1@16,65.5 16.25,65.5 18,63.75 18,57.75 ; 17.753,48.25 17,48.25 ; 18,58 18,57.75 ; S13.2@22.5,65.5 22.5,70 25.75,73.25 37.19,73.25 R66.1@37.44,73 39.25,73 ; P17.2@37.67,78.25 38.71,77.21 ; 17,48.25 18,47.25 ; 17,48.25 18,49.25 ; 17,56.75 18,55.75 ; 17,56.75 18,56.75 ; 17,56.75 18,57.75 ; 18,47.25 18,49.25 ; 18,49.25 18,55.75 ; 18,55.75 18,56.75 ; 18,56.75 18,57.75
NetP17_3: P17.3 R67.1 S14.1 S14.2 S18.1 S18.2 S22.1 S22.2 S26.1 S26.2 | length 57.3
  Bottom Layer w0.5: 40,70.5 41,70.5 41.5,71 41.5,76
  Bottom Layer w1: S26.1@26.5,39.5 28.5,41.5 28.5,47.25 ; S22.1@26.5,48.25 27.5,48.25 ; S18.1@26.5,56.75 27.5,56.75 ; S14.1@26.5,65.5 28.5,63.5 28.5,57.75 ; S14.2@33,65.5 33,68 35.5,70.5 R67.1@37.38,70.5 40,70.5 ; P17.3@40.21,78.25 40.21,77.54 41.25,76.5 41.5,76.25 41.5,76 ; 27.5,48.25 28.5,49.25 ; 27.5,48.25 28.5,48.25 ; 27.5,48.25 28.5,47.25 ; 27.5,56.75 28.5,57.75 ; 27.5,56.75 28.5,56.75 ; 27.5,56.75 28.5,55.75 ; 28.5,47.25 28.5,48.25 ; 28.5,48.25 28.5,49.25 ; 28.5,49.25 28.5,55.75 ; 28.5,55.75 28.5,56.75 ; 28.5,56.75 28.5,57.75
NetP17_4: P17.4 R68.1 S15.1 S15.2 S19.1 S19.2 S23.1 S23.2 S27.1 S27.2 | length 55.4
  Bottom Layer w0.5: 43,66.552 43,76
  Bottom Layer w1: S27.1@37.25,39.5 39.25,41.5 39.25,47.25 ; S23.1@37.25,48.25 38.25,48.25 ; S19.1@37.25,56.75 38.25,56.75 ; R68.1@37.44,68 37.44,66.5 ; P17.4@42.5,77.92 P17.4@42.58,78 ; P17.4@42.75,78.25 43,78 43,76 ; 43,66.552 43,66.25 S15.2@43.75,65.5 ; 37.44,66.5 37.44,65.69 S15.1@37.25,65.5 38.5,65.5 ; 37.44,66.5 37.5,66.5 38.5,65.5 ; 38.25,48.25 39.25,47.25 ; 38.25,48.25 39.25,48.25 ; 38.25,48.25 39.25,49.25 ; 38.25,56.75 39.25,55.75 ; 38.25,56.75 39.25,56.75 ; 38.25,56.75 39.25,57.75 ; 38.5,65.5 39.25,64.75 39.25,57.75 ; 39.25,47.25 39.25,48.25 ; 39.25,48.25 39.25,49.25 ; 39.25,49.25 39.25,55.75 ; 39.25,55.75 39.25,56.75 ; 39.25,56.75 39.25,57.75
NetP18_1: P18.1 S12.3 S12.4 S13.3 S13.4 S14.3 S14.4 S15.3 S15.4 | length 25.2
  Bottom Layer w1: S12.4@12.25,61 S13.3@16,61 ; S13.4@22.5,61 S14.3@26.5,61 ; S14.4@33,61 S15.3@37.25,61 ; S15.4@43.75,61 47.5,61 48.75,59.75 P18.1@48.75,52.08